# Altium PCB MOSFET Board Layout.PcbDoc
Units mil, origin at the board's own origin, x right, y up, seen from the top; angles counter-clockwise.
Board outline 6275 x 6390 mil, 4 copper layers (Top Layer, Signal Layer 1, GND, Bottom Layer), stack 30.634 mil thick; 69 components, 58 nets, 261 pads, 273 vias.
Unrouted connection lines stored in the file: 131.
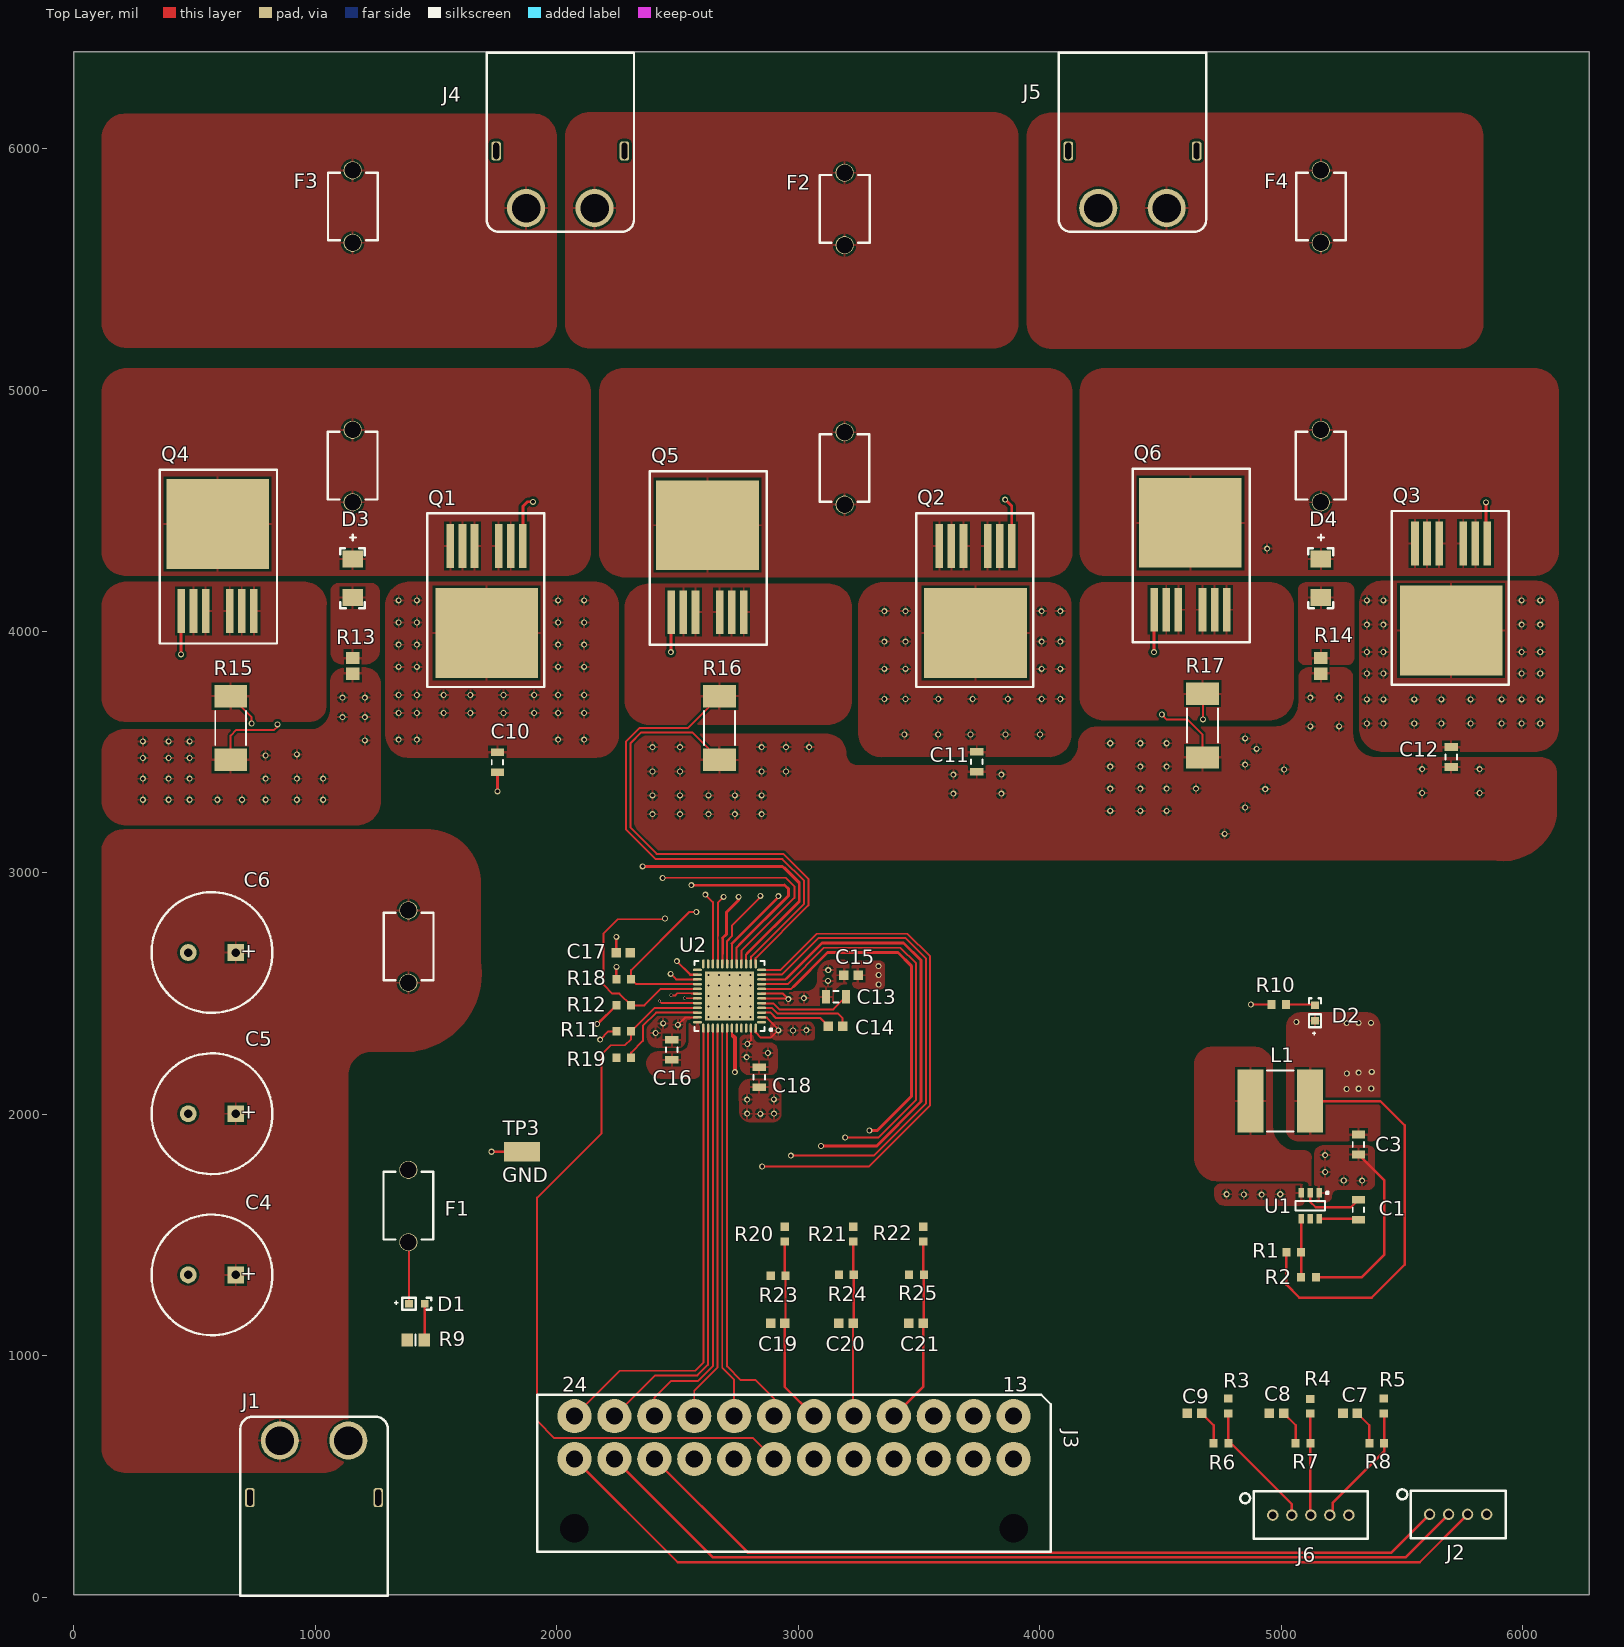
[diagram p0: Top Layer view]
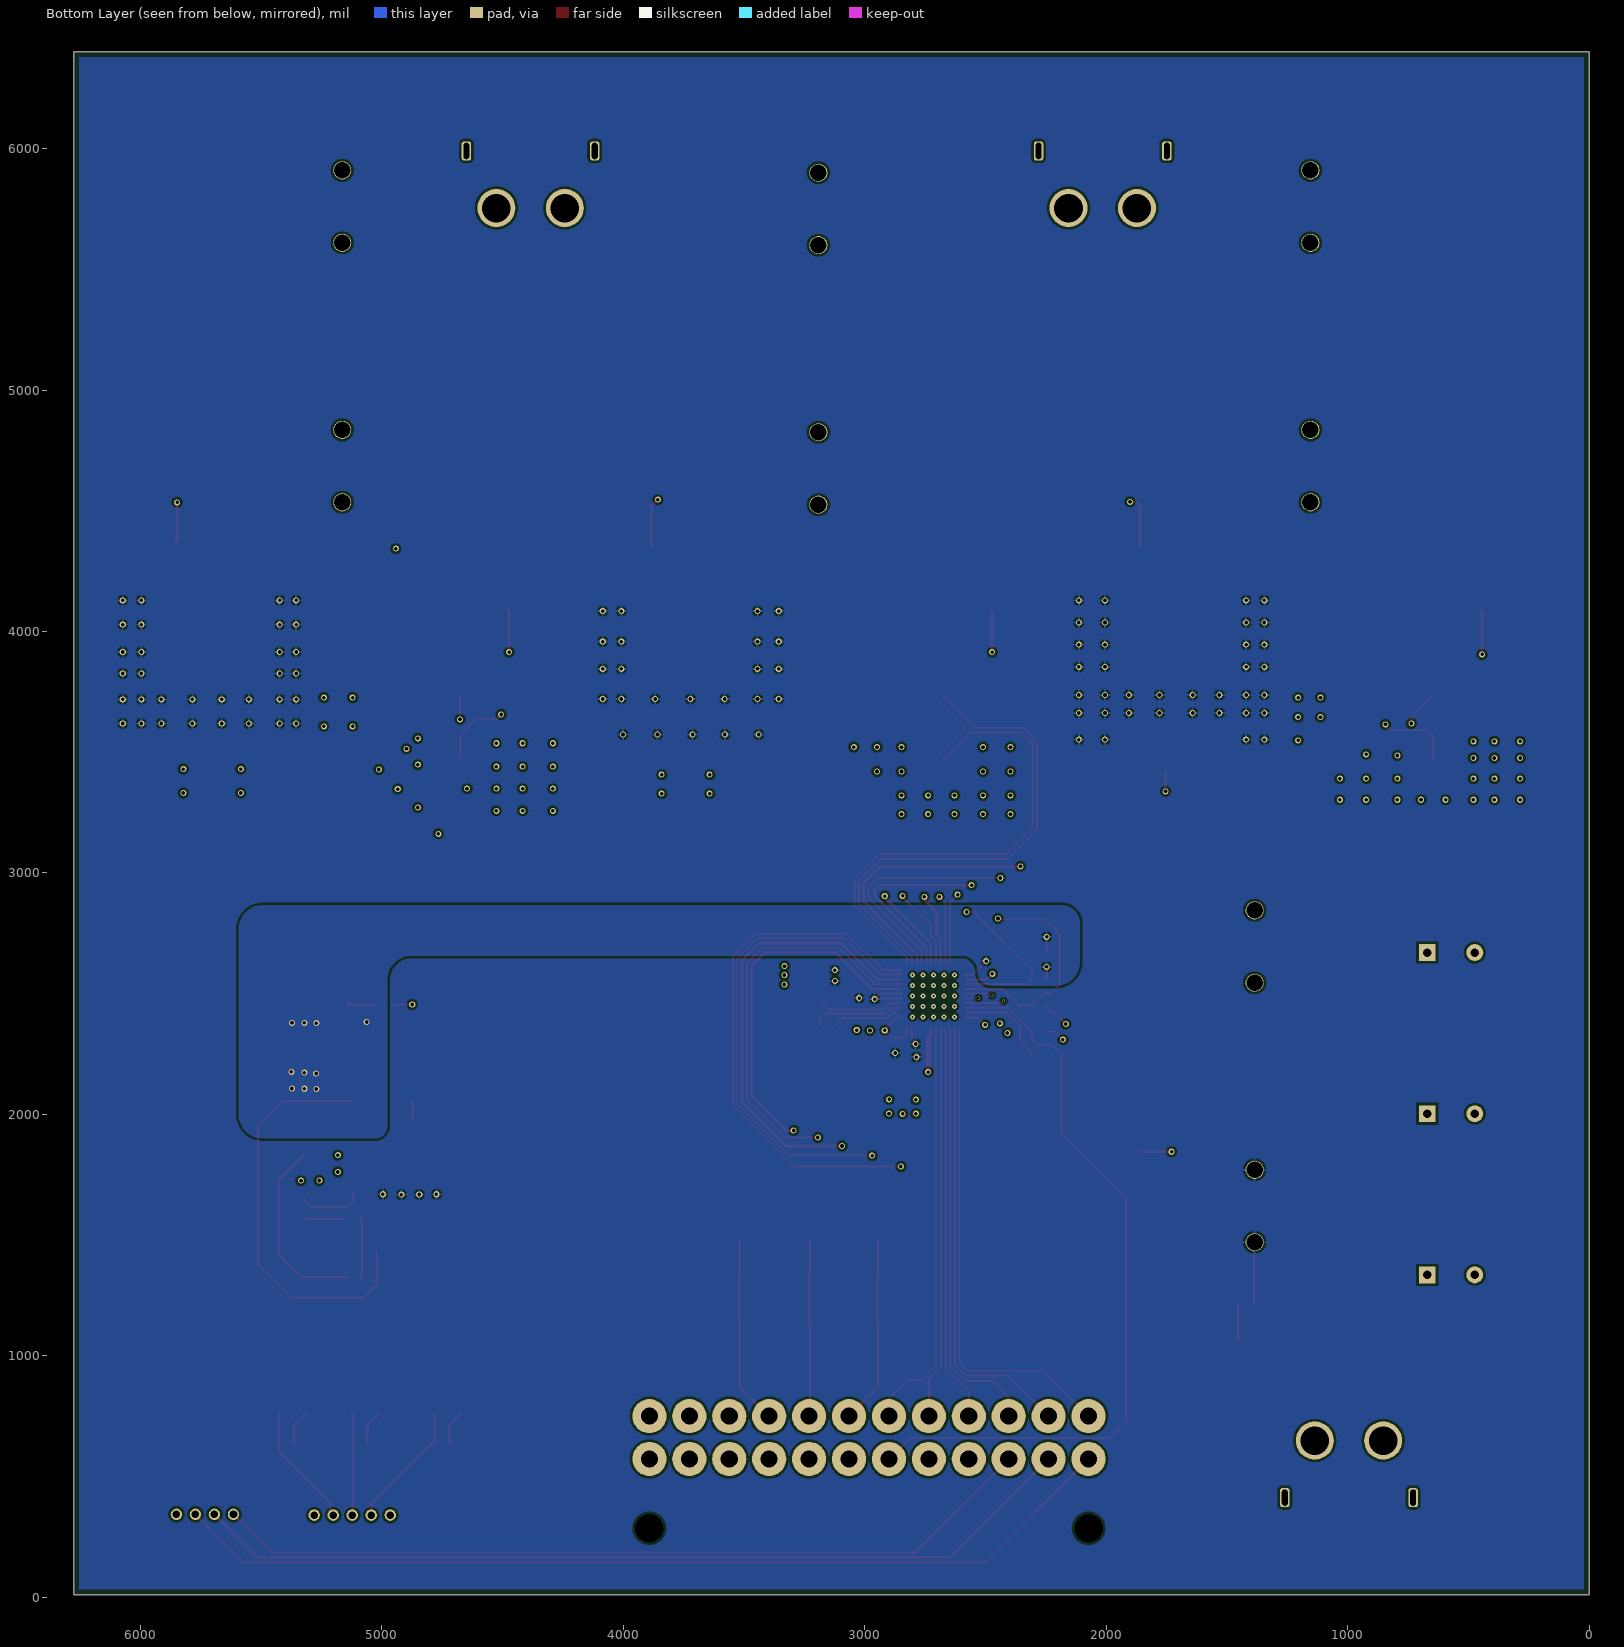
[diagram p1: Bottom Layer view, seen from below]
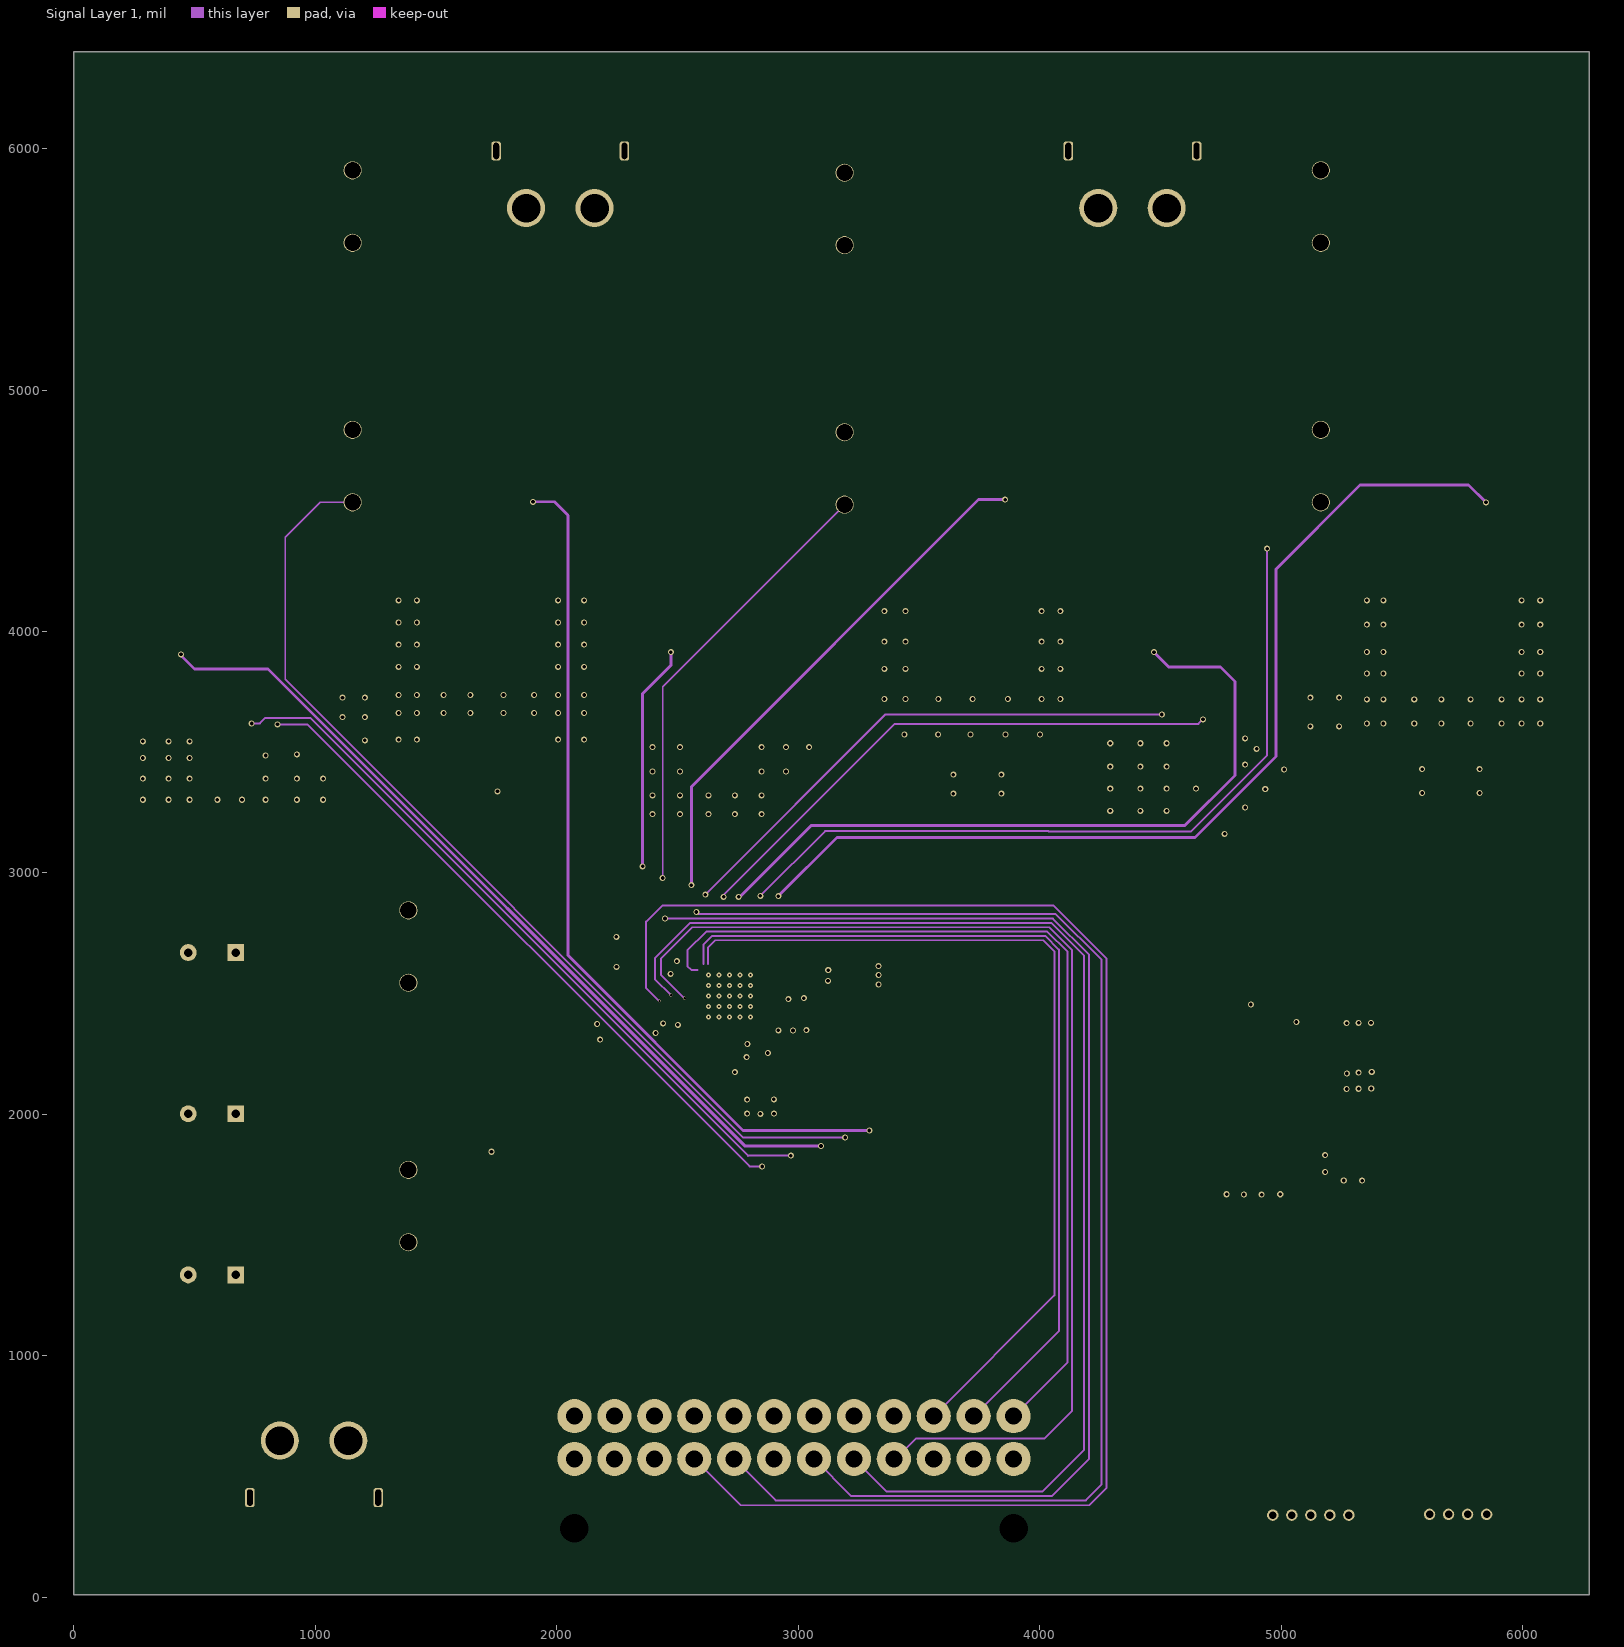
[diagram p2: Signal Layer 1]
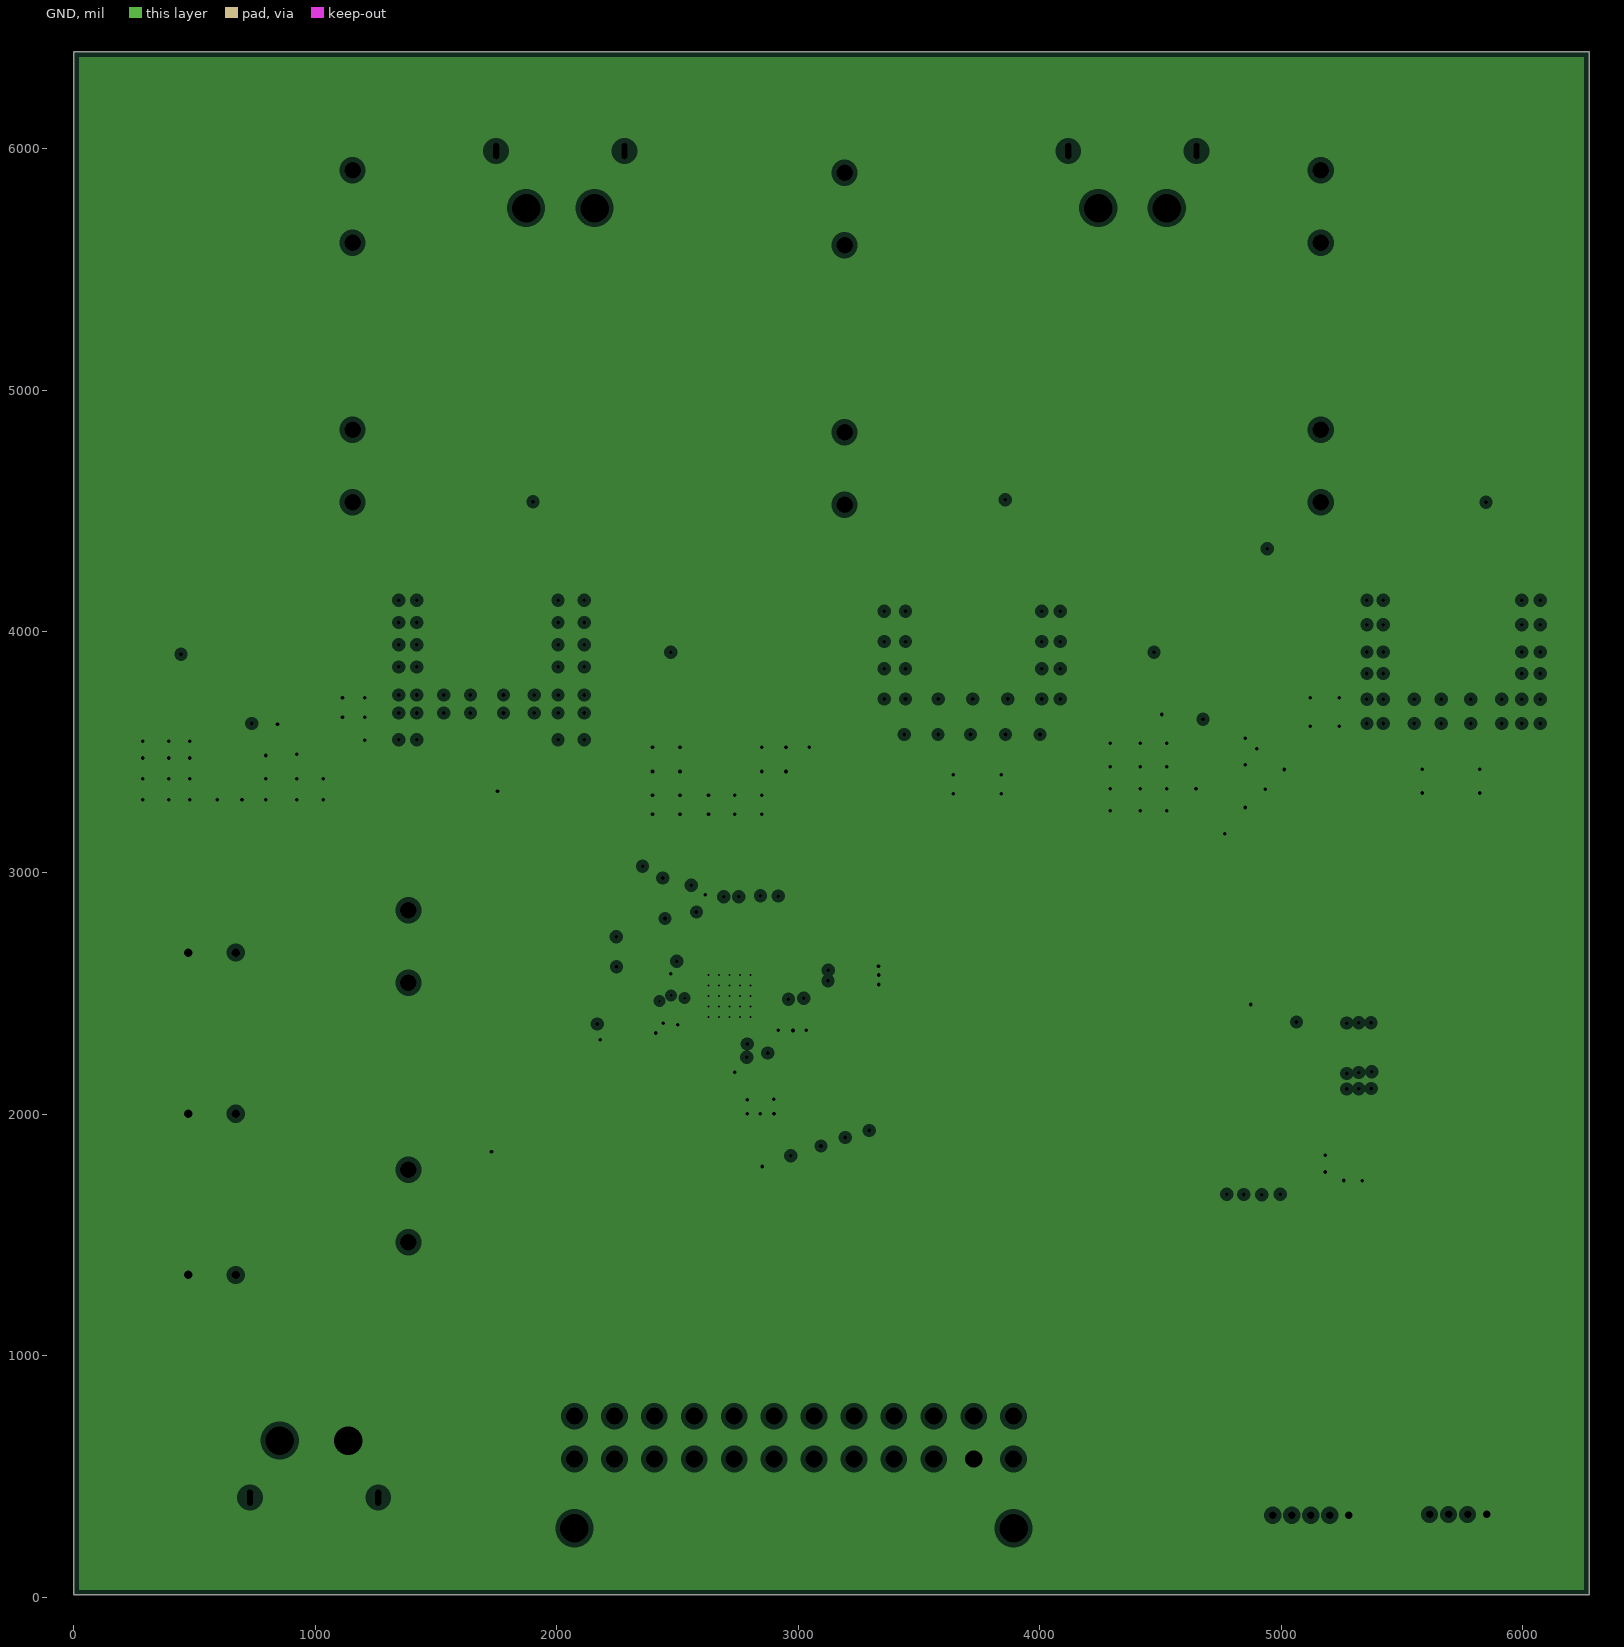
[diagram p3: GND, clearances drawn from the general rule]

## Layer stack, top to bottom
Top Solder: solder mask 0.4, Solder Resist, Dk 3.5
Top Layer: signal copper 1.4
Dielectric 1: core 10, FR-4, Dk 4.2
Signal Layer 1: signal copper 1.417
Dielectric 2: prepreg 5, Dk 4.2
GND: plane copper 1.417, net SNA
Dielectric 3: core 10, Dk 4.2
Bottom Layer: signal copper 1.4
Bottom Solder: solder mask 0.4, Solder Resist, Dk 3.5

## Board outline
0,10 0,6400 6275,6400 6275,10

## Design rules (kind name [scope] priority, off if disabled: settings)
Clearance [All] p1: gap=10 ignorepadtopadclearanceinfootprint=FALSE except(0: Arc-Hole Track-Hole SMDPad-Hole THPad-Hole Via-Hole Fill-Hole Poly-Hole Region-Hole Text-Hole)
PlaneClearance [All] p1: clearance=20
PlaneConnect [All] p1: planeconnectstyle=Relief reliefexpansion=20 reliefentries=4 reliefconductorwidth=10 reliefairgap=10
PolygonConnect [All] p1: connectstyle=Relief reliefconductorwidth=10 reliefentries=4 polygonreliefangle="90 Angle" airgapwidth=10
RoutingVias [All] p1: holewidth=10 width=13 viastyle="Through Hole" minholewidth=10 minwidth=13 maxholewidth=10 maxwidth=13
SolderMaskExpansion [All] p1: expansion=4
Width [All] p1: maxlimit=20 minlimit=8 preferedwidth=10 minimp=50.000000 maximp=50.000000 favimp=50.000000
28 further rules are at their usual default settings.

## Classes and differential pairs
component class "Gate Driver & H-Bridge": C10 C11 C12 C13 C14 C15 C16 C17 C18 C19 C20 C21 D3 D4 Q1 Q2 Q3 Q4 Q5 Q6 R11 R12 R13 R14 R15 R16 R17 R18 R19 R20 R21 R22 R23 R24 R25 U2
component class "Connectors & LEDs": C4 C5 C6 C7 C8 C9 D1 D2 F1 F2 F3 F4 J1 J2 J4 J5 J6 R4 R5 R6 R7 R8 R9 R10 TP3
component class "3.3V Regulator": C1 C3 L1 R1 R2 U1

## Components (designator, comment, footprint, x,y, rotation, side; value= is the part's Value field where it differs from the comment)
C1 "Cap" CAPC2012X06N 5320,1605 r90 top value=100nF
C3 "Cap" CAPC2012X06N 5320,1875 r90 top value=22uF
C4 "470uF" ECA1JHG471 565,1335 r180 top
C5 "470uF" ECA1JHG471 565,2002.5 r180 top
C6 "470uF" ECA1JHG471 565,2670 r180 top
C7 "16nF" "0603 CAP Medium" 5285.49,762 r0 top
C8 "16nF" "0603 CAP Medium" 4980.49,762 r0 top
C9 "16nF" "0603 CAP Medium" 4640.49,762 r0 top
C10 "Cap" CAPC2012X06N 1754,3458.66 r270 top value=1uF
C11 "Cap" CAPC2012X06N 3739,3460 r270 top value=1uF
C12 "Cap" CAPC2012X06N 5704,3480 r270 top value=1uF
C13 "Cap" CAPC2012X06N 3156,2487 r0 top value=1uF
C14 "Cap" "0603 CAP Medium" 3153.87,2365 r0 top value="47nF, 50V"
C15 "Cap" "0603 CAP Medium" 3218,2576 r180 top value="0.1uF, 50V"
C16 "Cap" CAPC2012X06N 2476,2267 r270 top value=1uF
C17 "Cap" "0603 CAP Medium" 2275,2670 r180 top value=0.1uF
C18 "Cap" CAPC2012X06N 2838,2154 r90 top value=1uF
C19 "Cap" "0603 CAP Medium" 2914.53,1134 r0 top value=47nF
C20 "Cap" "0603 CAP Medium" 3197.03,1134 r0 top value=47nF
C21 "Cap" "0603 CAP Medium" 3487.53,1134 r0 top value=47nF
D1 "LED, Green" "LED Green 0603" 1420,1215 r0 top
D2 "LED, Green" "LED Green 0603" 5140,2420 r90 top
D3 "Diode 11DQ03" Zener 1154,4220 r90 top
D4 "Diode 11DQ03" Zener 5164,4220 r90 top
F1 "Fuse, 40A" FUSE 1385,2157.6 r270 top
F2 "Fuse, 40A" FUSE 3191.5,5212.4 r270 top
F3 "Fuse, 40A" FUSE 1154,5222.4 r270 top
F4 "Fuse, 40A" FUSE 5164,5222.4 r270 top
J1 "XT-60" XTC60PW-M 994.25,648.7 r180 top
J2 "Hirose 4-pos" "Hirose 4-pos" 5732.63,343 r180 top
J3 "Molex 24-Pos" PCBComponent_1 2982.32,661.42 r0 top
J4 "XT-60" XTC60PW-M 2014.25,5753.78 r0 top
J5 "XT-60" XTC60PW-M 4384,5753.78 r0 top
J6 "5-Pos" "Hirose 5-pos" 5122.52,340 r180 top
L1 "Inductor" INDC8063X52N 4996.18,2055 r0 top value=10uH
Q1 "IPB180N04S400ATMA1" TO263-7-3 1709,3994 r180 top
Q2 "IPB180N04S400ATMA1" TO263-7-3 3734,3994 r180 top
Q3 "IPB180N04S400ATMA1" TO263-7-3 5704,4004 r180 top
Q4 "IPB180N04S400ATMA1" TO263-7-3 595,4445.24 r0 top
Q5 "IPB180N04S400ATMA1" TO263-7-3 2624,4440 r0 top
Q6 "IPB180N04S400ATMA1" TO263-7-3 4624,4450 r0 top
R1 "Res3" "RES 0603 MEDIUM" 5052,1429 r0 top value=100K
R2 "Res3" "RES 0603 MEDIUM" 5113,1326 r0 top value=22K
R3 "Res3" "RES 0603 MEDIUM" 4780.49,792 r90 top value=10K
R4 "Res3" "RES 0603 MEDIUM" 5119.49,791 r90 top value=10K
R5 "Res3" "RES 0603 MEDIUM" 5425.49,792 r90 top value=10K
R6 "Res3" "RES 0603 MEDIUM" 4750.49,637 r0 top value=100
R7 "Res3" "RES 0603 MEDIUM" 5090.49,637 r0 top value=100
R8 "Res3" "RES 0603 MEDIUM" 5395.49,637 r0 top value=100
R9 "Res3" 6-0805_N 1415,1065 r180 top value=1.5K
R10 "Res3" "RES 0603 MEDIUM" 4990,2455 r180 top value=100
R11 "Res3" "RES 0603 MEDIUM" 2276.97,2343.26 r0 top value=10K
R12 "Res3" "RES 0603 MEDIUM" 2276.97,2451.52 r180 top value=10K
R13 "Res3" RESC2013X04N 1154,3857.52 r90 top value=1K
R14 "Res3" RESC2013X04N 5164,3857.52 r90 top value=1K
R15 "Res3" RESC8032X08N 649,3600 r90 top value=0.001
R16 "Res3" RESC8032X08N 2674,3600 r90 top value=0.001
R17 "Res3" RESC8032X08N 4674,3610 r90 top value=0.001
R18 "Res3" "RES 0603 MEDIUM" 2276.97,2559.77 r180 top value=10K
R19 "Res3" "RES 0603 MEDIUM" 2276.97,2235 r0 top value=10K
R20 "Res3" "RES 0603 MEDIUM" 2944.53,1504 r270 top value=42.2K
R21 "Res3" "RES 0603 MEDIUM" 3227.03,1504 r270 top value=42.2K
R22 "Res3" "RES 0603 MEDIUM" 3517.53,1504 r270 top value=42.2K
R23 "Res3" "RES 0603 MEDIUM" 2916.5,1331 r180 top value=4.99K
R24 "Res3" "RES 0603 MEDIUM" 3199,1336 r180 top value=4.99K
R25 "Res3" "RES 0603 MEDIUM" 3489.5,1335 r180 top value=4.99K
TP3 "TP" "Test Point" 1855,1845 r180 top
U1 "TPS54308DDCR" SOT95P280X110-6N 5120,1620.87 r270 top
U2 "Driver Chip" QFN50P700X700X100_HS-49N 2715,2490 r180 top

## Footprints (in the part's own frame and the unit in brackets; to place one, negate y for a bottom-side part, rotate by r counter-clockwise, add the part's x,y. Pads: shape width x height; smd on the part's side, far side on the other; paste and mask are expansions set on the pad)
6-0805_N [mm] "Chip Resistor, Body 2.0x1.2mm, IPC Medium Density"
  rect 1.2x1.4 smd: 1(-0.9,0) 2(0.9,0)
  silkscreen extent 0,-0.6 0,0.6, body extent -1.07,-0.7 1.07,0.7, height 0.7
"0603 CAP Medium" [mm]
  rect 1x1 smd: 1(-0.75,0) 2(0.75,0)
  body extent -0.85,-0.48 0.85,0.48, height 0.9
CAPC2012X06N [mm] "Chip Capacitor, 2-Leads, Body 2.00x1.25mm, IPC Medium Density"
  rect 0.8x1.4 smd: 1(-1.05,0) 2(1.05,0)
  silkscreen extent -0.25,-0.6 0.25,0.6, body extent -1.05,-0.67 1.05,0.67, height 0.6
ECA1JHG471 [mil] "1"
  rect 70x70 hole 35.43: 1(-105,0)
  round 70 hole 35.43: 2(91.85,0)
  silkscreen extent -257,-250 243,250, body extent -253,-246 240,246, height 787
FUSE [mm] "Clip holder"
  round 1.905 hole 1.74: 1(-17.46,0) 1(-9.84,0) 2(9.84,0) 2(17.46,0)
  silkscreen extent -17.22,-2.62 17.17,2.64
"Hirose 4-pos" [mm]
  round 1.2 hole 0.8: 1(3,0) 2(1,0) 3(-1,0) 4(-3,0)
  silkscreen extent -5,-2.63 6.39,2.5
"Hirose 5-pos" [mm]
  round 1.2 hole 0.8: 1(4,0) 2(2,0) 3(0,0) 4(-2,0) 5(-4,0)
  silkscreen extent -6,-2.5 7.43,2.5
INDC8063X52N [mm] "Chip Inductor, 2-Leads, Body 8.00x6.30mm, IPC Medium Density"
  rect 2.72x6.62 smd: 1(-3.145,0) 2(3.145,0)
  silkscreen extent -1.4,-3.21 1.4,3.21, body extent -4.15,-3.3 4.15,3.3, height 5.2
"LED Green 0603" [mm] "Green 572nm LED Indication - Discrete 2.2V 0603 (1608 Metric)"
  rect 0.8x0.8 smd: 1(-0.825,0) 2(0.825,0)
  silkscreen extent -2.36,-0.64 1.52,0.64
PCBComponent_1 [mm]
  round 3.6 hole 1.8: 1(23.1,-2.25) 2(18.9,-2.25) 3(14.7,-2.25) 4(10.5,-2.25) 5(6.3,-2.25) 6(2.1,-2.25) 7(-2.1,-2.25) 8(-6.3,-2.25) 9(-10.5,-2.25) 10(-14.7,-2.25) 11(-18.9,-2.25) 12(-23.1,-2.25) 13(23.1,2.25) 14(18.9,2.25) 15(14.7,2.25) 16(10.5,2.25) 17(6.3,2.25) 18(2.1,2.25) 19(-2.1,2.25) 20(-6.3,2.25) 21(-10.5,2.25) 22(-14.7,2.25) 23(-18.9,2.25) 24(-23.1,2.25)
  round 1.524 hole 3: ""(-23.1,-9.55) ""(23.1,-9.55)
  silkscreen extent -27,-12 27,4.5, body extent -26,-16.8 26,8.4, height 11.4
QFN50P700X700X100_HS-49N [mm] "QFN, 48-Leads, Body 7.00x7.00mm, Pitch 0.50mm, Thermal Pad 5.15x5.15mm, IPC Medium Density"
  oval 0.95x0.25 smd: 1(-3.375,2.75) 2(-3.375,2.25) 3(-3.375,1.75) 4(-3.375,1.25) 5(-3.375,0.75) 6(-3.375,0.25) 7(-3.375,-0.25) 8(-3.375,-0.75) 9(-3.375,-1.25) 10(-3.375,-1.75) 11(-3.375,-2.25) 12(-3.375,-2.75) 25(3.375,-2.75) 26(3.375,-2.25) 27(3.375,-1.75) 28(3.375,-1.25) 29(3.375,-0.75) 30(3.375,-0.25) 31(3.375,0.25) 32(3.375,0.75) 33(3.375,1.25) 34(3.375,1.75) 35(3.375,2.25) 36(3.375,2.75)
  oval 0.25x0.95 smd: 13(-2.75,-3.375) 14(-2.25,-3.375) 15(-1.75,-3.375) 16(-1.25,-3.375) 17(-0.75,-3.375) 18(-0.25,-3.375) 19(0.25,-3.375) 20(0.75,-3.375) 21(1.25,-3.375) 22(1.75,-3.375) 23(2.25,-3.375) 24(2.75,-3.375) 37(2.75,3.375) 38(2.25,3.375) 39(1.75,3.375) 40(1.25,3.375) 41(0.75,3.375) 42(0.25,3.375) 43(-0.25,3.375) 44(-0.75,3.375) 45(-1.25,3.375) 46(-1.75,3.375) 47(-2.25,3.375) 48(-2.75,3.375)
  rect 5.15x5.15 smd: 49(0,0)
  silkscreen extent -4.47,-3.7 3.7,3.7, body extent -3.55,-3.55 3.55,3.55, height 1
"RES 0603 MEDIUM" [mm] "Chip Resistor, 2-Leads, Body 1.60x0.80mm, IPC Medium Density"
  rect 0.85x0.9 smd: 1(-0.775,0) 2(0.775,0)
  body extent -0.85,-0.45 0.85,0.45, height 0.55
RESC2013X04N [mm] "Chip Resistor, 2-Leads, Body 2.03x1.27mm, IPC Medium Density"
  rect 1.3x1.4 smd: 1(-0.825,0) 2(0.825,0)
  body extent -1.09,-0.7 1.09,0.7, height 0.39
RESC8032X08N [mm] "Chip Resistor, 2-Leads, Body 8.00x3.18mm, IPC Medium Density"
  rect 2.35x3.45 smd: 1(-3.35,0) 2(3.35,0)
  silkscreen extent -1.8,-1.63 1.8,1.63, body extent -4.15,-1.72 4.15,1.72, height 0.85
SOT95P280X110-6N [mm] "SOT23, 6-Leads, Body 2.90x2.80mm, Pitch 0.95mm, IPC Medium Density"
  rect 1x0.6 smd: 1(-1.375,0.95) 2(-1.375,0) 3(-1.375,-0.95) 4(1.375,-0.95) 5(1.375,0) 6(1.375,0.95)
  silkscreen extent -1.5,-1.55 0.5,1.93, body extent -0.88,-1.52 0.87,1.53, height 1.1
"Test Point" [mm] "Keystone Electronics (5029)"
  rect 3.8x2.03 smd: 1(0,0)
TO263-7-3 [mm]
  rect 0.8x4.6 smd: 1(-3.81,-9.15) 3(-2.54,-9.15) 3(-1.27,-9.15) 3(1.27,-9.15) 3(2.54,-9.15) 3(3.81,-9.15)
  rect 10.8x9.44 smd: 2(0,0)
  silkscreen extent -6.07,-12.57 6.25,5.69
XTC60PW-M [mm] "Male right angle xt60"
  round 4 hole 3: 1(3.6,0) 2(-3.6,0)
  rrect50% 1x2 hole 0.6 slot 1.7 at 90 deg: 3(-6.75,6) 4(6.75,6)
  silkscreen extent -7.75,-2.5 7.75,16.35, body extent -7.75,-1.91 7.75,16.29, height 2
Zener [mil]
  rect 70x85 smd: 1(-80,0) 2(80,0)
  silkscreen extent -124,-51 181,52

## Part data
C1 C3 C10 C11 C12 C13 C14 C15 C16 C17 C18 C19 C20 C21: "Capacitor", LatestRevisionDate=17-Jul-2002, LatestRevisionNote="Re-released for DXP Platform.", PackageDescription="Radial Cap, Thru-Hole; 2 Leads; 0.3 in Pin Spacing", PackageReference=RAD-0.3, Published=8-Jun-2000, Publisher="Altium Limited"
  C1: ComponentLink1Description="0.1uF, 50V", ComponentLink1URL=https://www.digikey.ca/product-detail/en/kemet/C0805C104M5RACTU/399-1169-1-ND/411444
  C3: ComponentLink1Description="22uF, 10V", ComponentLink1URL=https://www.digikey.com/product-detail/en/tdk-corporation/C2012X7S1A226M125AC/445-14560-1-ND/3956226
  C10 C11 C12 C13: ComponentLink1Description="1uF, 50V", ComponentLink1URL=https://www.digikey.ca/product-detail/en/samsung-electro-mechanics/CL21B105KBFNNNG/1276-6470-1-ND/5958098
  C14 C19 C20 C21: ComponentLink1Description="0.047uF, 50V", ComponentLink1URL=https://www.digikey.ca/product-detail/en/samsung-electro-mechanics/CL10B473KB8NFNC/1276-2075-1-ND/3890161
  C15 C17: ComponentLink1Description="0.1uF, 50V", ComponentLink1URL=https://www.digikey.ca/product-detail/en/samsung-electro-mechanics/CL10B104KB8WPNC/1276-6854-1-ND/5961713
C4 C5 C6: library part ECA-1JHG471, "Cap Aluminum Lytic 470uF 63V 20% (12.5 X 20mm) Radial 5mm 640mA 2000h 105C Bulk", Case/Package=Radial, Leakage Current=3uA, Manufacturer=Panasonic, Max Operating Temperature=105°C, Min Operating Temperature=-55°C, Package Quantity=200, Ripple Current=640mA, Tolerance=20%, Voltage=63V, Capacitance=470uF, ComponentLink1Description=https://datasheet.ciiva.com/14590/70067776-14590006.pdf, ComponentLink1URL=https://datasheet.ciiva.com/14590/70067776-14590006.pdf, ComponentLink2Description=https://datasheet.ciiva.com/17356/aba0000ce26-17356313.pdf, ComponentLink2URL=https://datasheet.ciiva.com/17356/aba0000ce26-17356313.pdf, ComponentLink3Description=https://datasheet.ciiva.com/48521/radial-nhg-eng-tds-48521993.pdf, ComponentLink3URL=https://datasheet.ciiva.com/48521/radial-nhg-eng-tds-48521993.pdf, ComponentLink4Description=https://datasheet.ciiva.com/30116/8aba0000ce26-30116426.pdf, ComponentLink4URL=https://datasheet.ciiva.com/30116/8aba0000ce26-30116426.pdf, ComponentLink5Description=https://datasheet.ciiva.com/2984/aba0000ce26-2984364.pdf, ComponentLink5URL=https://datasheet.ciiva.com/2984/aba0000ce26-2984364.pdf, ComponentLink6Description=https://datasheet.ciiva.com/11783/0900766b800301b8-11783820.pdf, ComponentLink6URL=https://datasheet.ciiva.com/11783/0900766b800301b8-11783820.pdf, ComponentLink7Description=https://datasheet.ciiva.com/43485/1504317-43485276.pdf, ComponentLink7URL=https://datasheet.ciiva.com/43485/1504317-43485276.pdf, Contact Plating=Tin, Diameter=12.5mm, Dissipation Factor=0.1%, Height=20mm, Height - Seated (Max)=0.866inch, Lead/Base Style=Straight, Lead Diameter=0.6mm, Lead Pitch=5mm, Length=20mm, Life (Hours)=2000Hour, Manufacturer Part Number=ECA-1JHG471, Mount="Through Hole,PCB", Packaging=Bulk, Polarity=Polar, Pricing 1="1=0.88, 10=0.67, 100=0.4792, 500=0.371, 1000=0.31948, 2500=0.29887, 5000=0.28341 (USD)", Radiation Hardening=No, REACH SVHC="No SVHC", Stock 1=12555, Supplier 1=Digi-Key, Termination=Radial, Voltage Rating=63V, Voltage Rating (DC)=63V
C7 C8 C9: library part 06035C163KAT2A, "Multilayer Ceramic Capacitors MLCC - SMD/SMT 50volts 0.016uF 10% X7R", Case/Package=0603, Case Code (Metric)=1608, Dielectric=X7R, Manufacturer="Kyocera AVX", Max Operating Temperature=125°C, Min Operating Temperature=-55°C, Package Quantity=4000, Tolerance=10%, Voltage Rating=50V, Capacitance=16nF, Case Code (Imperial)=0603, ComponentLink1Description=https://datasheet.ciiva.com/205/cx7r-205833.pdf, ComponentLink1URL=https://datasheet.ciiva.com/205/cx7r-205833.pdf, ComponentLink2Description=https://datasheet.ciiva.com/5418/cx7r-218113-5418475.pdf, ComponentLink2URL=https://datasheet.ciiva.com/5418/cx7r-218113-5418475.pdf, Depth=0.81mm, Dissipation Factor=2.5%, Length=1.6mm, Manufacturer Part Number=06035C163KAT2A, Mount="Surface Mount", Number of Pins=2, Packaging="Tape and Reel", Pricing 1="1=0.33, 10=0.224, 100=0.1271, 500=0.0897, 1000=0.07849 (USD)", Radiation Hardening=No, Stock 1=10610, Supplier 1=Digi-Key, Supplier 2=Digi-Key, Termination=SMD/SMT, Thickness=0.035inch, Voltage Rating (DC)=50V, Width=0.032inch
D1 D2: library part LED2, "Typical RED, GREEN, YELLOW, AMBER GaAs LED", ComponentLink1Description="LED (green)", ComponentLink1URL=https://www.digikey.ca/product-detail/en/rohm-semiconductor/SML-D12M8WT86/511-1578-1-ND/1641810, LatestRevisionDate=17-Jul-2002, LatestRevisionNote="Re-released for DXP Platform.", PackageDescription="SM LED; 2 Flat Leads", PackageReference=3.2X1.6X1.1, PackageVersion=Feb-2002, Published=8-Jun-2000, Publisher="Altium Limited"
D3 D4: "Schottky Rectifier", Code_JEDEC=DO-204-AL, ComponentLink1Description=Zener, ComponentLink1URL=https://www.digikey.ca/product-detail/en/micro-commercial-co/SMBJ5362B-TP/SMBJ5362B-TPMSCT-ND/1636228, DatasheetVersion=Dec-1997, LatestRevisionDate=17-Jul-2002, LatestRevisionNote="Re-released for DXP Platform.", PackageDescription="Diode, Axial; Body 5.2 x 2.7 mm (LxDia. max), Lead Dia. 0.86 mm (max)", PackageReference=DO-204AL, Published=8-Jun-2000, Publisher="Altium Limited"
F1 F2 F3 F4: library part "Fuse 2", "SUT-H-6332-40A00-CTG-TT-NI,                       Fuse Holder: BK/1A4534-01-R                                Alternative Fuse: AGC-40-R", ComponentLink1Description="Fuse Holder", ComponentLink1URL=https://www.digikey.ca/product-detail/en/eaton-electronics-division/BK-1A4534-01-R/283-2831-ND/1023742, ComponentLink2Description="Fuse (slow)", ComponentLink2URL=https://www.digikey.ca/product-detail/en/schurter-inc/SUT-H-6332-40A00-CTG-TT-NI/486-7270-ND/9760592, ComponentLink3Description="Fuse (fast)", ComponentLink3URL=https://www.digikey.ca/product-detail/en/eaton-electronics-division/AGC-40-R/283-2882-ND/1023792, LatestRevisionDate=17-Jul-2002, LatestRevisionNote="Re-released for DXP Platform.", PackageDescription="Thru-Hole; 2 Leads", PackageReference=PIN-W2/E2.8, Published=8-Jun-2000, Publisher="Altium Limited"
J1 J4 J5: "XT-60 Power Connector", Current_Max=60, ComponentLink1Description=Mechanical, ComponentLink1URL=https://cdn.sparkfun.com/datasheets/Prototyping/xt60.pdf
J3: library part "Molex 24-Pos (0039301240)"
J6: library part "5 pos", ComponentLink1Description="5-pos Hirose", ComponentLink1URL=https://www.digikey.ca/product-detail/en/hirose-electric-co-ltd/DF3A-5P-2DSA/H2097-ND/141521
L1: "PN: SRR6038-100Y                                                   10µH Shielded Wirewound Inductor 2A 38 mOhm Max Nonstandard", Code_IEC=1005, Code_JEITA=0402, ComponentLink1Description="10uH, 2.05A", ComponentLink1URL=https://www.digikey.com/product-detail/en/bourns-inc/SRR6038-100Y/SRR6038-100YCT-ND/2127571, ComponentLink2Description="10uH, Better Footprint", ComponentLink2URL=https://www.digikey.ca/product-detail/en/abracon-llc/ASPIAIG-S8050-100M-T/535-13652-1-ND/6595963, LatestRevisionDate=29-May-2009, LatestRevisionNote="IPC-7351 Footprint Added.", PackageDescription="Chip Inductor", PackageReference=0402-A, Published=8-Jun-2000, Publisher="Altium Limited"
Q1 Q2 Q3 Q4 Q5 Q6: "N-Channel 40V 180A (Tc) 300W (Tc) Surface Mount PG-TO263-7-3", ComponentLink1Description=NMOS, ComponentLink1URL=https://www.digikey.ca/product-detail/en/Infineon+Technologies/IPB180N04S400ATMA1/IPB180N04S400ATMA1DKR-ND/6560174
R1 R2 R3 R4 R5 R6 R7 R8 R9 R10 R11 R12 R13 R14 R15 R16 R17 R18 R19 R20 R21 R22 R23 R24 R25: "Resistor", LatestRevisionDate=29-May-2009, LatestRevisionNote="IPC-7351 Footprint Added.", PackageDescription="Chip Resistor", PackageReference=J1-0603, Published=8-Jun-2000, Publisher="Altium Limited"
  R1: ComponentLink1Description=100KOhm, ComponentLink1URL=https://www.digikey.ca/product-detail/en/vishay-dale/RCA0603100KFKEAHP/541-3247-1-ND/6561261
  R2: ComponentLink1Description=22KOhm, ComponentLink1URL=https://www.digikey.ca/product-detail/en/vishay-dale/CRCW060322K0FKEAHP/541-22.0KSCT-ND/2825994
  R3 R4 R5 R11 R12 R18 R19: ComponentLink1Description=10KOhm, ComponentLink1URL=https://www.digikey.ca/product-detail/en/vishay-dale/CRCW060310K0FKEAHP/541-10.0KSCT-ND/2222780
  R6 R7 R8 R10: ComponentLink1Description=100Ohm, ComponentLink1URL=https://www.digikey.ca/product-detail/en/vishay-dale/CRCW0603100RFKEA/541-100HCT-ND/1179695
  R9: ComponentLink1Description=1.5KOhm, ComponentLink1URL=https://www.digikey.ca/product-detail/en/rohm-semiconductor/ESR10EZPJ152/RHM1.5KKCT-ND/1762968
  R13 R14: ComponentLink1Description=1KOhm, ComponentLink1URL=https://www.digikey.ca/product-detail/en/vishay-thin-film/PCAN0805E1001BST5/764-1240-1-ND/6003314
  R15 R17: ComponentLink1Description="CS Res", ComponentLink1URL=https://www.digikey.ca/product-detail/en/stackpole-electronics-inc/CSNL2512FT1L00/CSNL2512FT1L00CT-ND/1646259
  R20 R21 R22: ComponentLink1Description=42.2KOhm, ComponentLink1URL=https://www.digikey.ca/product-detail/en/stackpole-electronics-inc/RMCF0603FT42K2/RMCF0603FT42K2CT-ND/1943096
  R23 R24 R25: ComponentLink1Description=4.99KOhm, ComponentLink1URL=https://www.digikey.ca/product-detail/en/vishay-dale/CRCW06034K99FKEAC/541-3985-1-ND/7928668
TP3: library part "Test Point (5029)", "Keystone Electronics PC Test Point, Miniature Phosphor Bronze, Silver Plating Surface Mount Mounting Type", ComponentLink1Description="Test Point", ComponentLink1URL=https://www.digikey.ca/product-detail/en/keystone-electronics/5029/36-5029CT-ND/5980631
U1: "Buck Switching Regulator IC Positive Adjustable 1V 1 Output 3A SOT-23-6 Thin, TSOT-23-6"
J2: ComponentLink1Description=4-pos, ComponentLink1URL=https://www.digikey.ca/product-detail/en/hirose-electric-co-ltd/DF3A-4P-2DSA/H2096-ND/141518
U2: ComponentLink1Description="Gate Driver", ComponentLink1URL=https://www.digikey.ca/product-detail/en/texas-instruments/DRV8323RSRGZT/296-46943-1-ND/7356148

## Via types
v1: diameter 25, hole 15, Top Layer to Bottom Layer, 245 vias
v2: diameter 19.68, hole 7.87, Top Layer to Bottom Layer, 25 vias
v3: diameter 13, hole 10, Top Layer to Bottom Layer, 3 vias

## Nets (pads, with @x,y where several pads share a name; then routed paths per layer and width w, separated by ;. In a path a pad name is that pad's centre, name@x,y a point inside that pad or via, vN(x,y) a via of type N, cw(c..) or ccw(c..) an arc to the next point about the centre after c; other vN are vias at no path point)
+3.3V: C3.2 C17.2 D2.1 J3.1 J6.1 L1.2 R1.1 R3.2 R4.2 R5.2 R12.2 R18.2 U2.26 | length 2072.1
  Top Layer w10: 2180,2387 v1(2167,2374) 2168.94,2374 R12.2 ; C17.2 2245.47,2734.02 v1(2246.46,2735) ; R18.2 2246.46,2610.46 v1(2247,2611) ; v1(2496.77,2634.23) 2552.42,2578.58 U2.26 ; R1.1 5021.49,1294.51 5075,1241 5375,1241 5511,1377 5511,1954.49 5410.49,2055 L1.2
  Signal Layer 1 w12: v1@2496.77,2629.95 v1(2496.77,2634.23)
  other v1: 5271,2105 5321,2106 5373,2107 5272,2169 5321,2173 5375,2176 5271,2378 5321,2379 5372.19,2379 5063,2382.52
CAL: R19.2 U2.34 | length 400.2
  Top Layer w8: R19.2 2307.48,2255.48 2356,2304 2356,2366.32 2410.78,2421.1 U2.34
CB: U2.44
Enable: J3.7 R11.2 U2.33 | length 3170.3
  Top Layer w8: U2.33 2405.01,2440.79 R11.2 2307.48,2311.48 2282,2286 2223,2286 2185,2248 2185,1922 1918,1655 1918,731.08 1990.08,659 2813.48,659 J3.7
FB: U2.1
GHA: Q1.1 U2.8 | length 5231.5
  Top Layer w8: U2.8 2970.53,2519.53 2980.76,2529.76
  Top Layer w12: Q1.1 1859,4518 1878,4537 v1(1901,4537) ; 2980.76,2529.76 3121,2670 3413,2670 3467.99,2615.01 3467.99,2074.01 3326.98,1933 v1(3294,1933)
  Signal Layer 1 w12: v1(1901,4537) 1990,4537 2046,4481 2046,2658.51 2771.51,1933 v1(3294,1933)
GHB: Q2.1 U2.17 | length 3213.4
  Top Layer w8: 2744.38,2647.09 2744.38,2623.02 U2.17
  Top Layer w9: 2744.38,2647.09 2744.38,2691.08 2756.97,2703.67
  Top Layer w12: v1(2557,2949) 2942,2949 2943,2950 2960,2933 2960,2906.7 2756.97,2703.67 ; v1(3857,4546) 3884,4519 Q2.1
  Signal Layer 1 w12: v1(2557,2949) 2557,3357 3746,4546 v1(3857,4546)
GHC: Q3.1 U2.18 | length 4680.1
  Top Layer w8: U2.18 2724.84,2646.56 2725.38,2647.09 ; Q3.1 Q3.1@5860.24,4358
  Top Layer w9: 2725.38,2647.09 2725.38,2707.16
  Top Layer w12: 2725.38,2707.16 2922.22,2904 v1(2917,2904) ; v1(5848,4535) 5848,4370.24 Q3.1@5860.24,4358
  Signal Layer 1 w12: v1(2917,2904) 3160,3147 4643.46,3147 4978,3481.54 4978,4258 5327,4607 5776,4607 v1(5848,4535)
GLA: Q4.1 U2.10 | length 5507.2
  Top Layer w9: U2.10 2946.9,2558.9 2953,2565
  Top Layer w12: v1(443,3905) 443,4083 Q4.1 ; 2953,2565 3098,2710 3436.26,2710 3507.99,2638.27 3507.99,2052.73 3323.26,1868 3322.26,1869 v1(3094,1869)
  Signal Layer 1 w12: v1(443,3905) 443,3901 499,3845 802.94,3845 2779.94,1868 2780.94,1869 v1(3094,1869)
GLB: Q5.1 U2.15 | length 2207.3
  Top Layer w8: U2.15 2783.9,2661.9 2790,2668
  Top Layer w12: v1(2355,3027) 2934,3027 2941,3020 2942,3021 3004,2959 3004,2882 2790,2668 ; v1(2472,3914) 2472,4077.76 Q5.1
  Signal Layer 1 w12: v1(2355,3027) 2355,3742 2472,3859 v1(2472,3914)
GLC: Q6.1 U2.20 | length 3524.7
  Top Layer w8: U2.20 2685.47,2664 2686.24,2664.76 ; Q6.1@4473,4088.76 Q6.1
  Top Layer w10: 2686.24,2664.76 2686.24,2730.24
  Top Layer w12: 2686.24,2730.24 2702,2746 2702,2837 2753,2888 v1(2753,2901) ; v1(4473,3914) Q6.1@4473,4088.76
  Signal Layer 1 w8: v1(2753,2901) v1@2758.58,2901 ; v1@4473,3911 v1(4473,3914)
  Signal Layer 1 w12: v1@2758.58,2901 3054.58,3197 4602,3197 4809,3404 4809,3793 4749,3853 4534,3853 v1(4473,3914)
HALL_A: C9.2 J2.1 J3.10 R6.1 | length 3582.7
  Top Layer w10: J3.10 2791.42,185 5456.52,185 J2.1 ; C9.2 4719.98,712.04 R6.1
HALL_B: C8.2 J2.2 J3.11 R7.1 | length 3843.4
  Top Layer w10: J3.11 2646.06,165 5515.26,165 J2.2 ; C8.2 5059.98,712.04 R7.1
HALL_C: C7.2 J2.3 J3.12 R8.1 | length 4104
  Top Layer w10: J3.12 2500.71,145 5574,145 J2.3 ; C7.2 5364.98,712.04 R8.1
INHA: J3.24 U2.37 | length 2022.7
  Top Layer w8: J3.24@2082,750 J3.24 2260.87,938 2573,938 2607,972 2607,2291 2607,2356.86 U2.37 U2.37@2605.15,2355.55
INHB: J3.22 U2.39 | length 1772.3
  Top Layer w8: J3.22 2403.58,825.58 2474,896 2584.54,896 2646.1,957.56 2646.1,2281 U2.39
INHC: J3.20 U2.41 | length 1627.7
  Top Layer w8: U2.41 2685,2356.65 2685,2280.53 2685,951 2734.29,901.71 J3.20
INLA: J3.23 U2.38 | length 1870.3
  Top Layer w8: J3.23 2407.27,919.04 2582.13,919.04 2625.65,962.57 2625.65,2306 2625.65,2356.36 U2.38
INLB: J3.21 U2.40 | length 1647.2
  Top Layer w8: J3.21 2568.94,854.94 2665.02,951.02 2665.02,2306 2665.02,2356.36 U2.40
INLC: J3.19 U2.42 | length 1723.3
  Top Layer w8: U2.42 2705.16,2306 2705.16,956.3 2762.46,899 2823.27,899 2899.65,822.62 J3.19
NetC1_1: C1.1 U1.6 | length 164.4
  Top Layer w10: U1.6 5316.93,1566.73 cw(c5316.93,1563.66) C1.1
NetC1_2: C1.2 L1.1 U1.2 | length 327.1
  Top Layer w10: L1.1@4872.36,1987.43 L1.1 ; U1.2 5120,1638 5143,1615 5288.66,1615 C1.2
NetC13_2: C13.2 U2.5 | length 381.6
  Top Layer w8: U2.5 2848.64,2459.71 2896.87,2459.71 2921.58,2435 3145.34,2435 C13.2
NetC14_1: C14.1 U2.3 | length 280.9
  Top Layer w8: 2867,2421.87 2883.8,2421.87 2906.67,2399 3090.35,2399 C14.1
NetC14_2: C14.2 U2.4 | length 386.6
  Top Layer w8: U2.4 2848.64,2440.02 2891.1,2440.02 2914.13,2417 3165,2417 3183.4,2398.6 C14.2
NetC16_2: C16.2 U2.36
NetD1_2: D1.2 R9.1 | length 150.8
  Top Layer w10: R9.1 1452.48,1067.05 D1.2
NetD2_2: D2.2 R10.1 | length 120.9
  Top Layer w10: R10.1 5137.48,2455 cw(c5137.48,2452.48) D2.2
NetD3_1: D3.1 R13.2
NetD4_1: D4.1 R14.2
NetF2_1: F2.1 J4.1
NetF3_1: F3.1 J4.2
NetF4_1: F4.1 J5.1
NetJ6_2: J6.2 R3.1 R6.2 | length 537.6
  Top Layer w10: R3.1 4781,760.98 R6.2 4793,637 5043.78,386.22 J6.2
NetJ6_3: J6.3 R4.1 R7.2 | length 421.7
  Top Layer w10: R4.1 5121,758.98 R7.2 5121,341.52 J6.3
NetJ6_4: J6.4 R5.1 R8.2 | length 521.7
  Top Layer w10: J6.4 5213,340 5213,390 5426,603 R8.2 5426,760.98 R5.1
NetR1_2: R1.2 R2.1 U1.4 | length 240.8
  Top Layer w10: R2.1 R1.2 5082.51,1566.73 U1.4
nFault: J3.8 R18.1 U2.28 | length 6244.1
  Top Layer w8: v1(2578,2838) 2548,2838 2307.48,2597.48 R18.1 2327.28,2539.98 2581.36,2539.98 U2.28
  Signal Layer 1 w8: v1(2578,2838) 2587,2829 4066.25,2829 4256,2639.25 4256,514 ; J3.8 2906.13,401 4190.67,401 4255.67,466 4255.67,514
SCLK: J3.4 U2.31 | length 4783.7
  Top Layer w8: v3(2529,2481) 2529.08,2480.92 2581.36,2480.92 U2.31
  Signal Layer 1 w8: v3(2529,2481) 2528,2480 2432,2576 2432,2646 2561,2775 4039.54,2775 4133,2681.54 4133,771 4019.7,657.7 3487.7,657.7 3402.83,572.83 J3.4
SHA: D3.2 F3.2 Q1.3 Q4.2 R20.1 U2.9 | length 5685.2
  Top Layer w8: U2.9 2955.5,2539.21 3106.28,2690 3423,2690 3487.99,2625.01 3487.99,2061.01 3330.98,1904 v1(3194,1904)
  Signal Layer 1 w8: F3.2@1154,4535 1020,4535 875,4390 875,3801.22 2772.22,1904 v1(3194,1904)
SHB: F2.2 Q2.3 Q5.2 R21.1 U2.16 | length 2831
  Top Layer w8: v1(2438.44,2979) 2439.44,2980 2948,2980 2984,2944 2984,2896.76 2764.21,2676.98 U2.16
  Signal Layer 1 w8: v1(2438.44,2979) 2438.44,3771.94 F2.2@3191.5,4525
SHC: D4.2 F4.2 Q3.3 Q6.2 R22.1 U2.19 | length 3536.8
  Top Layer w8: U2.19 2705.92,2623.64 2705.92,2638.27 2705.38,2638.81 2705.38,2717.93 2725,2737.54 2725,2781.67 2843,2899.67 v1(2843,2905)
  Signal Layer 1 w8: v1(2843,2905) 3111,3173 4035.72,3173 4037.72,3171 4625,3171 4942,3488 v1(4942,4343)
SIMO: J3.5 U2.30 | length 5317.9
  Top Layer w8: v3(2473,2493) 2491,2493 2499.5,2501.5 2557.5,2501.5 2559.16,2499.84 U2.30
  Signal Layer 1 w8: v3(2473,2493) 2406,2560 2406,2647 2552,2793 4047,2793 4184,2656 4184,610 4011,437 3366.19,437 J3.5
SNA: C3.1 C4.2 C5.2 C6.2 C7.1 C8.1 C9.1 C10.2 C11.2 C12.2 C15.1 C16.1 C17.1 C18.1 C19.1 C20.1 C21.1 J1.2 J2.4 J3.2 J6.5 R2.2 R9.2 R10.2 R11.1 R13.1 R14.1 R15.1 R16.1 R17.1 R19.1 R23.2 R24.2 R25.2 TP3.1 U1.1 U2.2 U2.12 U2.13 U2.22 U2.27 U2.35 U2.43 U2.48 U2.49 | length 11932.8
  Top Layer w8: R15.1 649,3569 672.5,3592.5 829.5,3592.5 843,3606 v1(843,3615) ; v1(2179,2309.41) 2212.84,2343.26 R11.1 ; v1(2615,2910) 2646.1,2878.9 U2.22 ; R16.1 2560.11,3582 2349.46,3582 2305.46,3538 2305.46,3187 2413.46,3079 2937.74,3079 3042,2974.74 3042,2865.6 2823.27,2646.87 U2.13 ; 2724.84,2329.26 2729,2325.1 ; U2.48 2823.27,2339.73 2845,2318 2874.76,2318 2875,2317.76 2886.76,2317.76 v1(2917,2348) 2917,2353.14 2869.49,2400.65 2847.87,2400.65 U2.2 ; U2.12 2926.27,2598.27 3076,2748 3452,2748 3546,2654 3546,2037 3293,1784 v1(2850,1784) ; v1(4506,3656) 4526.71,3635.29 4612.71,3635.29 4674,3574 R17.1
  Top Layer w9: v1(2471,2582) 2494.1,2558.9 U2.27 ; v1(2501,2370.95) 2531.47,2401.42 U2.35 ; 2724.84,2329.26 U2.43
  Top Layer w10: v1(4874,2455) R10.2 ; R2.2 5334,1326 5426,1418 5426,1727.66 C3.1
  Top Layer w12: v1(1729,1845) TP3.1 ; v1(1754,3338) C10.2
  Top Layer w17: 2729,2325.1 2737,2317.1 v1(2737,2175)
  Signal Layer 1 w8: v1(843,3615) 967,3615 2798,1784 v1(2850,1784) ; v1(2615,2910) 3361,3656 v1(4506,3656)
  other v1: 5335,1725 5259,1725.84 5182,1761 5182,1831 2788,2002.5 2843,2002 2899.54,2002.5 2788.26,2061 2899,2062 2409,2337 2978,2347 3033,2349 2440,2377 3333,2537.77 3333,2577 3332,2614 4766,3162 2396.17,3243 2510,3243 2628,3243 2737,3243 2847.87,3243 4292,3257 4417,3257 4525.73,3257 4851,3271 285,3303 392,3303 479,3303 594,3303 696,3303 794,3303 923,3303 1032,3303 2396.17,3321 2510,3321 2628,3321 2737,3321 2847.87,3321 3642,3328 3841,3328 5584,3331 5822,3331 4934,3347 4292,3349 4417,3349 4525.73,3349 4647,3349 285,3390 392,3390 479,3390 794,3390 923,3390 1032,3390 3642,3407 3841,3407 2396.17,3420 2510,3420 2847.87,3420 2949,3420 5012,3428 5584,3430 5822,3430 4292,3440 4417,3440 4525.73,3440 4851,3448 285,3476 392,3476 479,3476 794,3486.03 923,3491 4898,3514 2396.17,3521 2510,3521 2847.87,3521 2949,3521 3045,3521 4292,3537 4417,3537 4525.73,3537 285,3545 392,3545 479,3545 1205,3549 4851,3557 5121,3607 5240,3607 1112,3645 1205,3645 1112,3726 1205,3726 5121,3726 5240,3726
  other v2: 2628.39,2403.39 2671.69,2403.39 2715,2403.39 2758.31,2403.39 2801.61,2403.39 2628.39,2446.69 2671.69,2446.69 2715,2446.69 2758.31,2446.69 2801.61,2446.69 2628.39,2490 2671.69,2490 2715,2490 2758.31,2490 2801.61,2490 2628.39,2533.31 2671.69,2533.31 2715,2533.31 2758.31,2533.31 2801.61,2533.31 2628.39,2576.61 2671.69,2576.61 2715,2576.61 2758.31,2576.61 2801.61,2576.61
SOA: J3.13 U2.25 | length 3769.2
  Signal Layer 1 w8: 2582.13,2598.27 2556.73,2598.27 2541,2614 2541,2678.91 2619.09,2757 4031,2757 4115,2673 4115,973.23 J3.13
SOB: J3.14 U2.24 | length 3668.8
  Signal Layer 1 w8: 2606.73,2622.87 2606.73,2702.73 2643,2739 4022,2739 4079,2682 4079,1102.58 J3.14
SOC: J3.15 U2.23 | length 3666.2
  Signal Layer 1 w8: 2626.42,2622.87 2626.42,2691.42 2656,2721 4014.54,2721 4061,2674.54 4061,1249.94 J3.15
SOMI: J3.6 R12.1 U2.29 | length 6117.5
  Top Layer w8: v1@2445,2808 2252,2808 2194,2750 2194,2536 2230,2500 2259,2500 R12.1 2362.52,2451.52 2430.53,2519.53 U2.29
  Signal Layer 1 w8: v1@2445,2808 v1(2448,2811) 4054.46,2811 4204,2661.46 4204,573 4050,419 3218.83,419 J3.6
SPA: Q4.3 R15.2 U2.11 | length 5171
  Top Layer w8: R15.2 736,3644.89 v1(736,3619) ; U2.11 2848.64,2579.35 2932.8,2579.35 3083.46,2730 3444.54,2730 3528,2646.54 3528,2044.46 3312.54,1829 v1(2969,1829)
  Signal Layer 1 w8: v1(736,3619) 770,3619 793,3642 977.65,3642 2791.65,1828 2792.65,1829 v1(2969,1829)
SPB: Q5.3 R16.2 U2.14 | length 2091.2
  Top Layer w8: R16.2 2542.11,3600 2342,3600 2285.84,3543.84 2285.84,3181.16 2410,3057 2934.28,3057 3024,2967.28 3024,2873.05 2804.35,2653.4 2804.35,2623.64 U2.14
SPC: Q6.3 R17.2 U2.21 | length 2693
  Top Layer w8: U2.21 2666.5,2623.59 2666.5,2721.69 2666.24,2721.95 2666.24,2738.52 2666.5,2738.78 2666.5,2876.5 v1(2691,2901) ; R17.2 4676,3739.89 v1(4676,3636)
  Signal Layer 1 w8: v1(2691,2901) 2687,2905 3399,3617 4657,3617 v1(4676,3636)
SSEL: J3.9 U2.32 | length 6547.6
  Top Layer w8: v3(2425,2469) 2433.5,2460.5 2537.49,2460.5 2538.23,2461.24 2581.36,2461.24 U2.32
  Signal Layer 1 w8: v3(2425,2469) 2424,2469 2370,2523 2370,2798 2436.5,2864.5 4057.5,2864.5 4276,2646 4276,452 4205,381 2760.77,381 J3.9
SW: U2.45
V_BATT: C10.1 C11.1 C12.1 C13.1 C15.2 C18.2 D1.1 F1.2 Q1.2 Q2.2 Q3.2 U1.3 U2.6 U2.7 U2.47 | length 557.9
  Top Layer w8: v1(2789,2291.32) 2803.58,2305.9 U2.47 U2.47@2804.35,2356.36 ; v1@2956.06,2480.16 v1(2959,2477.22)
  Top Layer w9: U2.6 2956.06,2480.16 2936.38,2499.84 U2.7
  Top Layer w10: F1.2@1385,1470.2 1387.52,1467.68 D1.1
  other v1: 4919,1667.26 4845,1668 4774,1669 4996,1669 2786.17,2237 2873.78,2254 3022.95,2481 3123,2553 3124,2597 1345,3552 1420,3552 2005,3552 2113,3552 3439,3573 3579,3573 3713,3573 3858,3573 4001,3573 5355,3619 5423,3619 5551,3619 5663,3619 5785,3619 5913,3619 5996,3619 6073,3619 1345,3662 1420,3662 1531,3662 1642,3662 1779,3662 1906,3662 2005,3662 2113,3662 5355,3719 5423,3719 5551,3719 5663,3719 5785,3719 5913,3719 5996,3719 6073,3719 3356,3720 3444,3720 3580,3720 3722,3720 3868,3720 4008,3720 4085,3720 1345,3737.02 1420,3737.02 1531,3737.02 1642,3737.02 1779,3737.02 1906,3737.02 2005,3737.02 2113,3737.02 5355,3826 5423,3826 5996,3826 6073,3826 3356,3845 3444,3845 4008,3845 4085,3845 1345,3853.02 1420,3853.02 2005,3853.02 2113,3853.02 5355,3915 5423,3915 5996,3915 6073,3915 1345,3945.02 1420,3945.02 2005,3945.02 2113,3945.02 3356,3958 3444,3958 4008,3958 4085,3958 5355,4028 5423,4028 5996,4028 6073,4028 1345,4037.02 1420,4037.02 2005,4037.02 2113,4037.02 3356,4084 3444,4084 4008,4084 4085,4084 1345,4129.02 1420,4129.02 2005,4129.02 2113,4129.02 5355,4129 5423,4129 5996,4129 6073,4129
Vin_NF: C4.1 C5.1 C6.1 F1.1 J1.1
VoltA: C19.2 J3.18 R20.2 R23.1 | length 775.8
  Top Layer w10: R20.2 2944.53,1333.48 R23.1 2947.01,1136.95 C19.2 2944.06,870.94 J3.18
VoltB: C20.2 J3.17 R21.2 R24.1 | length 727.3
  Top Layer w10: R21.2 3227.03,1338.48 R24.1 3229.51,1136.95 C20.2 3226.56,753.8 J3.17
VoltC: C21.2 J3.16 R22.2 R25.1 | length 776
  Top Layer w10: J3.16 3517.06,871.35 C21.2 3520.01,1136.95 R25.1 3517.53,1337.48 R22.2
pads on no net: J1.3 J1.4 J3. J3.3 J4.3 J4.4 J5.2 J5.3 J5.4 U1.5 U2.46

## Polygon pours and split planes (outlines as drawn)
SNA on Top Layer "SNA_L01_P035" (solid, pour order 35): 208,3594 ccw(c208,3501) 115,3501 115,3298 ccw(c215,3298) 215,3198 1171,3198 ccw(c1171,3298) 1271,3298 1271,3782 ccw(c1202,3782) 1202,3851 1123,3851 ccw(c1123,3789) 1061,3789 1061,3679 cw(c976,3679) 976,3594
SHC on Top Layer "SHC_L01_P025" (solid, pour order 25): 4265,5090 ccw(c4265,4990) 4165,4990 4165,4340 ccw(c4270,4335) 4265,4230 6050,4230 ccw(c6045,4335) 6150,4340 6150,4990 ccw(c6050,4990) 6050,5090
+3.3V on Top Layer "+3.3V_L01_P067" (solid, pour order 67): 5020,2360 cw(c5083,2360) 5083,2423 5353,2423 cw(c5353,2365) 5411,2365 5411,1925 cw(c5375,1925) 5375,1889 5070,1889 cw(c5070,1939) 5020,1939
V_BATT on Top Layer "V_BATT_L01_P103" (solid, pour order 103): 2757,2203 ccw(c2797,2203) 2797,2163 2882,2163 ccw(c2882,2196) 2915,2196 2915,2264.96 ccw(c2883,2264.96) 2883,2296.96 2838.04,2296.96 cw(c2838.04,2320) 2815,2320 ccw(c2806,2320) 2806,2329 2779,2329 ccw(c2779,2307) 2757,2307
SNA on Top Layer "SNA_L01_P059" (solid, pour order 59): 2304,3476 cw(c2404,3476) 2404,3576 3117,3576 cw(c3117,3495) 3198,3495 ccw(c3247,3495) 3247,3446 4074,3446 ccw(c4074,3531) 4159,3531 cw(c4234,3531) 4234,3606 4972,3606 ccw(c4972,3706) 5072,3706 5072,3808 cw(c5115,3808) 5115,3851 5257,3851 cw(c5257,3811) 5297,3811 5297,3578 ccw(c5397,3578) 5397,3478 6076.59,3478 cw(c6076.59,3413) 6141.59,3413 6141.59,3238.59 cw(c5916.5,3277.09) 5878,3052 2593,3052 cw(c2554,3302) 2304,3263
SPC on Top Layer "SPC_L01_P045" (solid, pour order 45): 4426,4203 4264.67,4203 ccw(c4264.67,4103) 4164.67,4103 4164.67,3733 ccw(c4264.67,3733) 4264.67,3633 4952,3633 ccw(c4952,3733) 5052,3733 5052,4104 ccw(c4952.5,4103.5) 4952,4203 4426,4204
SHB on Top Layer "SHB_L01_P023" (solid, pour order 23): 2275,5090 ccw(c2275,4990) 2175,4990 2175,4335 ccw(c2280,4330) 2275,4225 4035,4225 ccw(c4030,4330) 4135,4335 4135,4990 ccw(c4035,4990) 4035,5090
SHA on Top Layer "SHA_L01_P021" (solid, pour order 21): 215.82,5090 ccw(c215.82,4990) 115.82,4990 115.82,4330 ccw(c215.82,4330) 215.82,4230 2040,4230 ccw(c2040,4330) 2140,4330 2140,4990 ccw(c2040,4990) 2040,5090
SPA on Top Layer "SPA_L01_P027" (solid, pour order 27): 215.82,4205 ccw(c215.82,4105) 115.82,4105 115.82,3725 ccw(c215.82,3725) 215.82,3625 975,3625 ccw(c975,3695.72) 1045.72,3695.72 1045.72,4105 ccw(c952.86,4112.14) 960,4205
V_BATT on Top Layer "V_BATT_L01_P131" (solid, pour order 131): 2878,2489 cw(c2899,2489) 2899,2510 3032,2510 ccw(c3032,2556) 3078,2556 3078,2579 cw(c3139,2579) 3139,2640 3188,2640 cw(c3188,2617) 3211,2617 3211,2553 cw(c3196,2553) 3196,2538 3195,2538 ccw(c3195,2490) 3147,2490 3147,2471 cw(c3125,2471) 3125,2449 2919,2449 cw(c2919,2490) 2878,2490
SNA on Top Layer "SNA_L01_P097" (solid, pour order 97): 2372.88,2353.14 2372.88,2316.88 ccw(c2419.83,2321.94) 2425,2275 2502,2275 ccw(c2502,2306) 2533,2306 2533,2374 cw(c2551,2374) 2551,2392 ccw(c2551,2399) 2558,2399 2558,2404 ccw(c2552,2404) 2552,2410 2443,2410 ccw(c2436.37,2346.52)
SNA on Top Layer "SNA_L01_P091" (solid, pour order 91): 5137.48,1769 5137.48,1835.48 cw(c5174,1835.48) 5174,1872 5357.95,1872 cw(c5357.95,1841.95) 5388,1841.95 5388,1717 cw(c5358,1717) 5358,1687 5234.53,1687 ccw(c5234.53,1662.47) 5210,1662.47 5210,1661 cw(c5183,1661) 5183,1634 5151,1634 cw(c5151,1648) 5137,1648
NetC1_2 on Top Layer "NETC1_2_L01_P083" (solid, pour order 83): 4966,2200 ccw(c4886,2200) 4886,2280 4714,2280 ccw(c4714,2206) 4640,2206 4640,1822 ccw(c4740,1822) 4740,1722 5096,1722 cw(c5096,1703) 5115,1703 5115,1680 ccw(c5120,1680) 5120,1675 5121,1675 ccw(c5121,1683) 5125,1676.07 5125,1811.75 ccw(c5094.01,1819.38) 5086.38,1850.38 5054,1850.38 cw(c5066.31,1950.69) 4966,1963
SNA on Top Layer "SNA_L01_P127" (solid, pour order 127): 2754,2098 2754,2099 cw(c2803,2099) 2803,2148 2887,2148 cw(c2887,2105) 2930,2105 2930,2002 cw(c2896,2002) 2896,1968 2799,1968 cw(c2799,2012) 2755,2012
SNA on Top Layer "SNA_L01_P141" (solid, pour order 141): 2883,2362.92 cw(c2904,2362.92) 2904,2383.92 3040.93,2383.92 cw(c3040.93,2356.86) 3068,2356.86 3068,2318 cw(c3056,2318) 3056,2306 2913,2306 cw(c2913,2336) 2883,2336
no net on Top Layer "Vin_NF" (solid, pour order 139): 2932,2384
SNA on Top Layer "SNA_L01_P137" (solid, pour order 137): 3222,2609 cw(c3249,2609) 3249,2636 3338,2636 cw(c3338,2615) 3359,2615 3359,2538 cw(c3339,2538) 3339,2518 3251,2518 cw(c3251,2547) 3222,2547
no net on Top Layer "Vin_NF" (solid, pour order 135): 3289,2640
no net on Top Layer "Vin_NF" (solid, pour order 133): 3276,2639
no net on Top Layer "Vin_NF" (solid, pour order 117): 2725,2312.86
no net on Top Layer "Vin_NF" (solid, pour order 115): 2725,2312.86
no net on Top Layer "Vin_NF" (solid, pour order 113): 2748,2299
no net on Top Layer "Vin_NF" (solid, pour order 111): 2748,2299
no net on Top Layer "Vin_NF" (solid, pour order 109): 2733,2321.79
no net on Top Layer "Vin_NF" (solid, pour order 107): 2718,2297.11
no net on Top Layer "Vin_NF" (solid, pour order 105): 2724,2325
NetC16_2 on Top Layer "NETC16_2_L01_P101" (solid, pour order 101): 2371,2212 cw(c2420,2212) 2420,2261 2504,2261 ccw(c2504,2304) 2547,2304 2547,2376.5 cw(c2557.5,2376.5) 2557.5,2387 2590.73,2387 cw(c2590.73,2381.73) 2596,2381.73 2596,2174 cw(c2570,2174) 2570,2148 2435,2148 cw(c2435,2212)
no net on Top Layer "Vin_NF" (solid, pour order 99): 2432,2261
no net on Top Layer "Vin_NF" (solid, pour order 95): 2438,2404
no net on Top Layer "Vin_NF" (solid, pour order 93): 2451,2410
no net on Top Layer "Vin_NF" (solid, pour order 89): 5231,1872
V_BATT on Top Layer "V_BATT_L01_P087" (solid, pour order 87): 4722,1683 cw(c4752,1683) 4752,1713 5077,1713 cw(c5077,1693) 5097,1693 5097,1643 cw(c5075,1643) 5075,1621 4768,1621 cw(c4768,1667) 4722,1667
no net on Top Layer "Vin_NF" (solid, pour order 85): 4784,1711
no net on Top Layer "Vin_NF" (solid, pour order 79): 5120,1737
no net on Top Layer "Vin_NF" (solid, pour order 71): 4771,2285
no net on Top Layer "Vin_NF" (solid, pour order 69): 4792,2293
Vin_NF on Top Layer "Vin_NF" (solid, pour order 61): 2257,3309
Vin_NF on Top Layer "Vin_NF" (solid, pour order 57): 2500,3507.5
Vin_NF on Top Layer "Vin_NF" (solid, pour order 55): 2561,3576
Vin_NF on Top Layer "Vin_NF" (solid, pour order 53): 2452,3573
NetD4_1 on Top Layer "NETD4_1_L01_P051" (solid, pour order 51): 5154,4203 5102,4203 ccw(c5102,4171) 5070,4171 5070,3890 ccw(c5098,3890) 5098,3862 5275,3862 ccw(c5275,3889) 5302,3889 5302,4171.5 ccw(c5270.5,4171.5) 5270.5,4203 5184,4203
V_BATT on Top Layer "V_BATT_L01_P047" (solid, pour order 47): 5423,4211 ccw(c5423,4111) 5323,4111 5323,3601.34 ccw(c5423,3601.34) 5423,3501.34 6050,3501.34 ccw(c6050,3601.34) 6150,3601.34 6150,4111 ccw(c6050,4111) 6050,4211
V_BATT on Top Layer "Vin_NF" (solid, pour order 43): 3349,4203 ccw(c3349,4103) 3249,4103 3249,3573 ccw(c3348.5,3579.5) 3355,3480 4034.25,3480 ccw(c4036.25,3575) 4131.25,3573 4131.25,4106 ccw(c4034.25,4106) 4034.25,4203
SPB on Top Layer "SPB_L01_P041" (solid, pour order 41): 2382,4198 ccw(c2382,4098) 2282,4098 2282,3714 ccw(c2382,3714) 2382,3614 3122,3614 ccw(c3122,3714) 3222,3714 3222,4098 ccw(c3122,4098) 3122,4198
V_BATT on Top Layer "V_BATT_L01_P039" (solid, pour order 39): 1390,4206 ccw(c1390,4106) 1290,4106 1290,3569 ccw(c1386,3573) 1390,3477 2156,3477 ccw(c2160,3573) 2256,3569 2256,4106 ccw(c2156,4106) 2156,4206
Vin_NF on Top Layer "Vin_NF" (solid, pour order 37): 1294,4016
Vin_NF on Top Layer "Vin_NF" (solid, pour order 33): 234,3606
NetD3_1 on Top Layer "NETD3_1_L01_P031" (solid, pour order 31): 1063.12,4015 1063.12,4166.9 cw(c1096.22,4166.9) 1096.22,4200 1231.99,4200 cw(c1231.99,4165.79) 1266.2,4165.79 1266.2,3922.7 cw(c1208.5,3922.7) 1208.5,3865 1110.23,3865 cw(c1109.18,3911.05) 1063.12,3910
NetF3_1 on Top Layer "NETF3_1_L01_P019" (solid, pour order 19): 1900,6145 cw(c1900,6045) 2000,6045 2000,5285 cw(c1895,5280) 1900,5175 215,5175 cw(c220,5280) 115,5285 115,6045 cw(c215,6045) 215,6145
NetF4_1 on Top Layer "NETF4_1_L01_P017" (solid, pour order 17): 5737.12,6148.37 cw(c5737.12,6048.37) 5837.12,6048.37 5837.12,5281.51 cw(c5731.36,5275.75) 5737.12,5170 4047.12,5170 cw(c4052.87,5275.75) 3947.12,5281.51 3947.12,6048.37 cw(c4047.12,6048.37) 4047.12,6148.37
NetF2_1 on Top Layer "Vin_NF" (solid, pour order 13): 3810,6150 cw(c3810,6050) 3910,6050 3910,5273.84 cw(c3810,5273.84) 3810,5173.84 2135,5173.84 cw(c2135,5273.84) 2035,5273.84 2035,6050 cw(c2135,6050) 2135,6150
Vin_NF on Top Layer "Vin_NF" (solid, pour order 11): 3950,5585
Vin_NF on Top Layer "Vin_NF" (solid, pour order 3): 215,515 cw(c215,615) 115,615 115,3100 cw(c205,3090) 215,3180 1463.75,3180 cw(c1463.76,2959.76) 1684,2959.75 1684,2631.42 cw(c1360.57,2583.43) 1408.53,2260 1235,2260 ccw(c1235,2160) 1135,2160 1135,615 cw(c1035.01,614.99) 1035,515
V_BATT on Bottom Layer "V_BATT_L04_P160" (solid, pour order 160): 22,32 22,6378 6253,6378 6253,32
+3.3V on Bottom Layer "+3.3V_L04_P158" (solid, pour order 158): 2109,2791 cw(c2185,2791) 2185,2867 5492,2867 cw(c5492,2767) 5592,2767 5592,2000 cw(c5492,2000) 5492,1900 5029,1900 cw(c5029,1951) 4978,1951 4978,2557 ccw(c4878,2557) 4878,2657 2598,2657 ccw(c2598,2591) 2532,2591 cw(c2473,2591) 2473,2532 2209,2532 cw(c2209,2632) 2109,2632
SNA on GND (split plane): 6254.9,6379.9 6254.9,30.1 20.1,30.1 20.1,6379.9

## Other copper
Top Layer:
  region: 3667,4214
Bottom Layer:
  pour cut-out: 1953,2670
  pour cut-out: 1965,2745

## Silkscreen, mask and mechanical layers (free items; w line width, h text height)
Top Overlay:
  text "GND" at 1773,1719 h60

## Text inside footprints (layer, text, board x,y; h text height)
C4: Top Overlay "+" at 760,1365 h60 r180
C5: Top Overlay "+" at 760,2032.5 h60 r180
C6: Top Overlay "+" at 760,2700 h60 r180
J3: Top Overlay "13" at 3847.32,851.42 h60; Top Overlay "24" at 2022.32,851.42 h60